# Altium PCB ECB01-Kit-001.PcbDoc
Units mm, origin at the board's own origin, x right, y up, seen from the top; angles counter-clockwise.
Board outline 16.09 x 9.12 mm, 2 copper layers (Top Layer, Bottom Layer); 7 components, 7 nets, 21 pads, 14 vias.
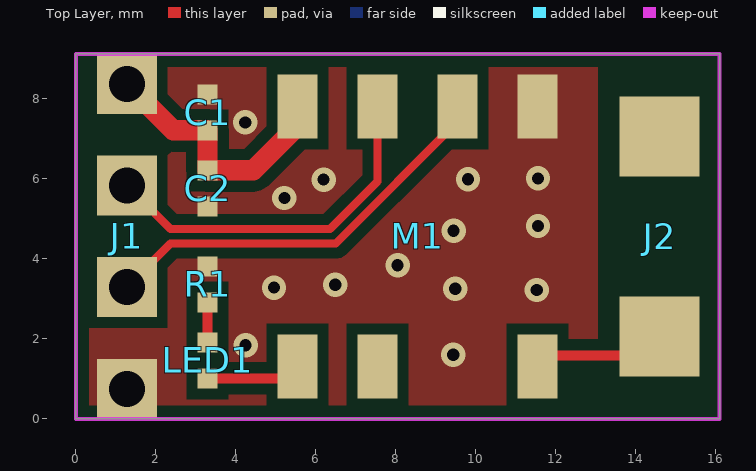
[diagram p0: Top Layer view]
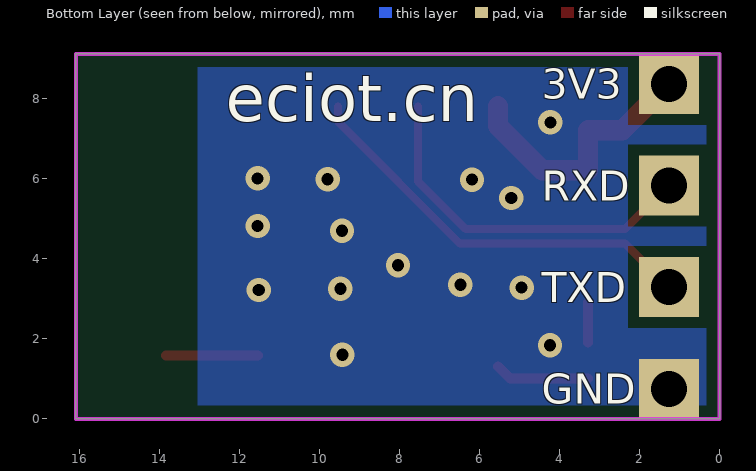
[diagram p1: Bottom Layer view, seen from below]

## Layer stack, top to bottom
Top Solder: solder mask 0.0102, Solder Resist, Dk 3.5
Top Layer: signal copper 0.0356
Dielectric 1: dielectric 0.32, FR-4, Dk 4.8
Bottom Layer: signal copper 0.0356
Bottom Solder: solder mask 0.0102, Solder Resist, Dk 3.5

## Board outline
0,0 16.09,0 16.09,9.12 0,9.12

## Design rules (kind name [scope] priority, off if disabled: settings)
Clearance [All] p1: gap=0.152 ignorepadtopadclearanceinfootprint=FALSE except(0: Arc-Hole Track-Hole SMDPad-Hole THPad-Hole Via-Hole Fill-Hole Poly-Hole Region-Hole Text-Hole)
PlaneConnect [All] p1: planeconnectstyle=Direct reliefexpansion=0.508 reliefentries=4 reliefconductorwidth=0.254 reliefairgap=0.254
PolygonConnect [All] p1: connectstyle=Direct reliefconductorwidth=0.254 reliefentries=4 polygonreliefangle="90 Angle" airgapwidth=0.254
RoutingVias [All] p1: holewidth=0.711 width=1.27 viastyle="Through Hole" minholewidth=0.711 minwidth=1.27 maxholewidth=0.711 maxwidth=1.27
SolderMaskExpansion [All] p1: expansion=0.102
Width [All] p1: maxlimit=2.54 minlimit=0.152 preferedwidth=0.254 minimp=50.000000 maximp=50.000000 favimp=50.000000
29 further rules are at their usual default settings.

## Components (designator, comment, footprint, x,y, rotation, side; value= is the part's Value field where it differs from the comment)
C1 "10uF" 0402 3.29,7.66 r270 top
C2 "100nF" 0402 3.29,5.76 r90 top
J1 "CON4" SIP04 1.27,4.56 r270 top
J2 "ANT" AN2051 14.59,2.06 r90 top
LED1 "0402 蓝" 0402-led 3.29,1.46 r90 top
M1 "ECB01" ECB01 13.04,0.81 r270 top
R1 "2.2kΩ" 0402 3.29,3.36 r90 top

## Footprints (in the part's own frame and the unit in brackets; to place one, negate y for a bottom-side part, rotate by r counter-clockwise, add the part's x,y. Pads: shape width x height; smd on the part's side, far side on the other; paste and mask are expansions set on the pad)
0402 [mm]
  rect 0.5x0.5 smd paste+0: 1(-0.45,0) 2(0.45,0)
0402-led [mm]
  rect 0.5x0.5 smd paste+0: 1(-0.45,0) 2(0.45,0)
AN2051 [mm]
  rect 2x2 smd: 1(0,0) 2(5,0)
ECB01 [mm]
  rect 1.6x1 smd: 1(-7,-1.5) 2(-7,-3.5) 3(-7,-5.5) 4(-7,-7.5) 5(-0.5,-7.5) 6(-0.5,-5.5) 7(-0.5,-1.5)
SIP04 [mm]
  rect 1.5x1.5 hole 0.9: 1(-3.81,0) 2(-1.27,0) 3(1.27,0) 4(3.81,0)

## Part data
C1 C2: library part C, 封装=04
LED1: library part LED-0402, 封装=04, 类型=L
R1: library part R, 封装=04

## Via types
v1: diameter 0.61, hole 0.305, Top Layer to Bottom Layer, tented both sides, 14 vias

## Nets (pads, with @x,y where several pads share a name; then routed paths per layer and width w, separated by ;. In a path a pad name is that pad's centre, name@x,y a point inside that pad or via, vN(x,y) a via of type N, cw(c..) or ccw(c..) an arc to the next point about the centre after c; other vN are vias at no path point)
+3.3V: C1.2 C2.2 J1.1 M1.4 | length 6.7
  Top Layer w0.508: J1.1 2.43,7.21 C1.2 C2.2 4.43,6.21 5.54,7.32 M1.4
GND: C1.1 C2.1 J1.4 M1.1 R1.2
  other v1: 9.43,1.6 4.24,1.84 11.52,3.22 9.48,3.25 4.95,3.28 6.48,3.35 8.04,3.84 9.44,4.7 11.55,4.82 5.21,5.52 6.19,5.98 9.8,5.99 11.55,6.01 4.23,7.41
NetJ2_1: J2.1 M1.7 | length 2.3
  Top Layer w0.254: M1.7@11.54,1.58 J2.1@13.84,1.58
NetLED1_1: LED1.1 M1.5 | length 2.4
  Top Layer w0.254: LED1.1 5.24,1.01 M1.5
NetLED1_2: LED1.2 R1.1 | length 1
  Top Layer w0.254: LED1.2 R1.1
RXD: J1.2 M1.3 | length 9.1
  Top Layer w0.203: J1.2 2.36,4.74 6.347,4.74 7.54,5.933 M1.3
TXD: J1.3 M1.2 | length 10.4
  Top Layer w0.203: J1.3 2.364,4.384 6.494,4.384 9.54,7.43 M1.2
pads on no net: J2.2 M1.6

## Polygon pours and split planes (outlines as drawn)
GND on Top Layer "Top Layer-GND" (solid, remove dead copper, pour order 0): 0,9.12 13.04,9.12 13.04,0 0,0
GND on Bottom Layer "Bottom Layer-GND" (solid, remove dead copper, pour order 2): 0,9.12 13.04,9.12 13.04,0 0,0

## Keep-outs
Keep-Out Layer:
  the board outline again, w0.1

## Silkscreen, mask and mechanical layers (free items; w line width, h text height)
Bottom Overlay:
  text "3V3" at 4.44,7.995 h0.75
  text "eciot.cn" at 12.35,7.05 h2
  text "RXD" at 4.44,5.455 h0.75
  text "TXD" at 4.44,2.915 h0.75
  text "GND" at 4.44,0.375 h0.75

## Text inside footprints (layer, text, board x,y; h text height)
LED1: Mechanical 1 "+" at 3.39,0.79 h0.2 r90